# Altium PCB PCB1.PcbDoc (part 1 of 2)
Units mil, origin at the board's own origin, x right, y up, seen from the top; angles counter-clockwise.
Board outline 3937.01 x 3937.01 mil, 2 copper layers (Top Layer, Bottom Layer); 170 components, 123 nets, 575 pads, 355 vias.
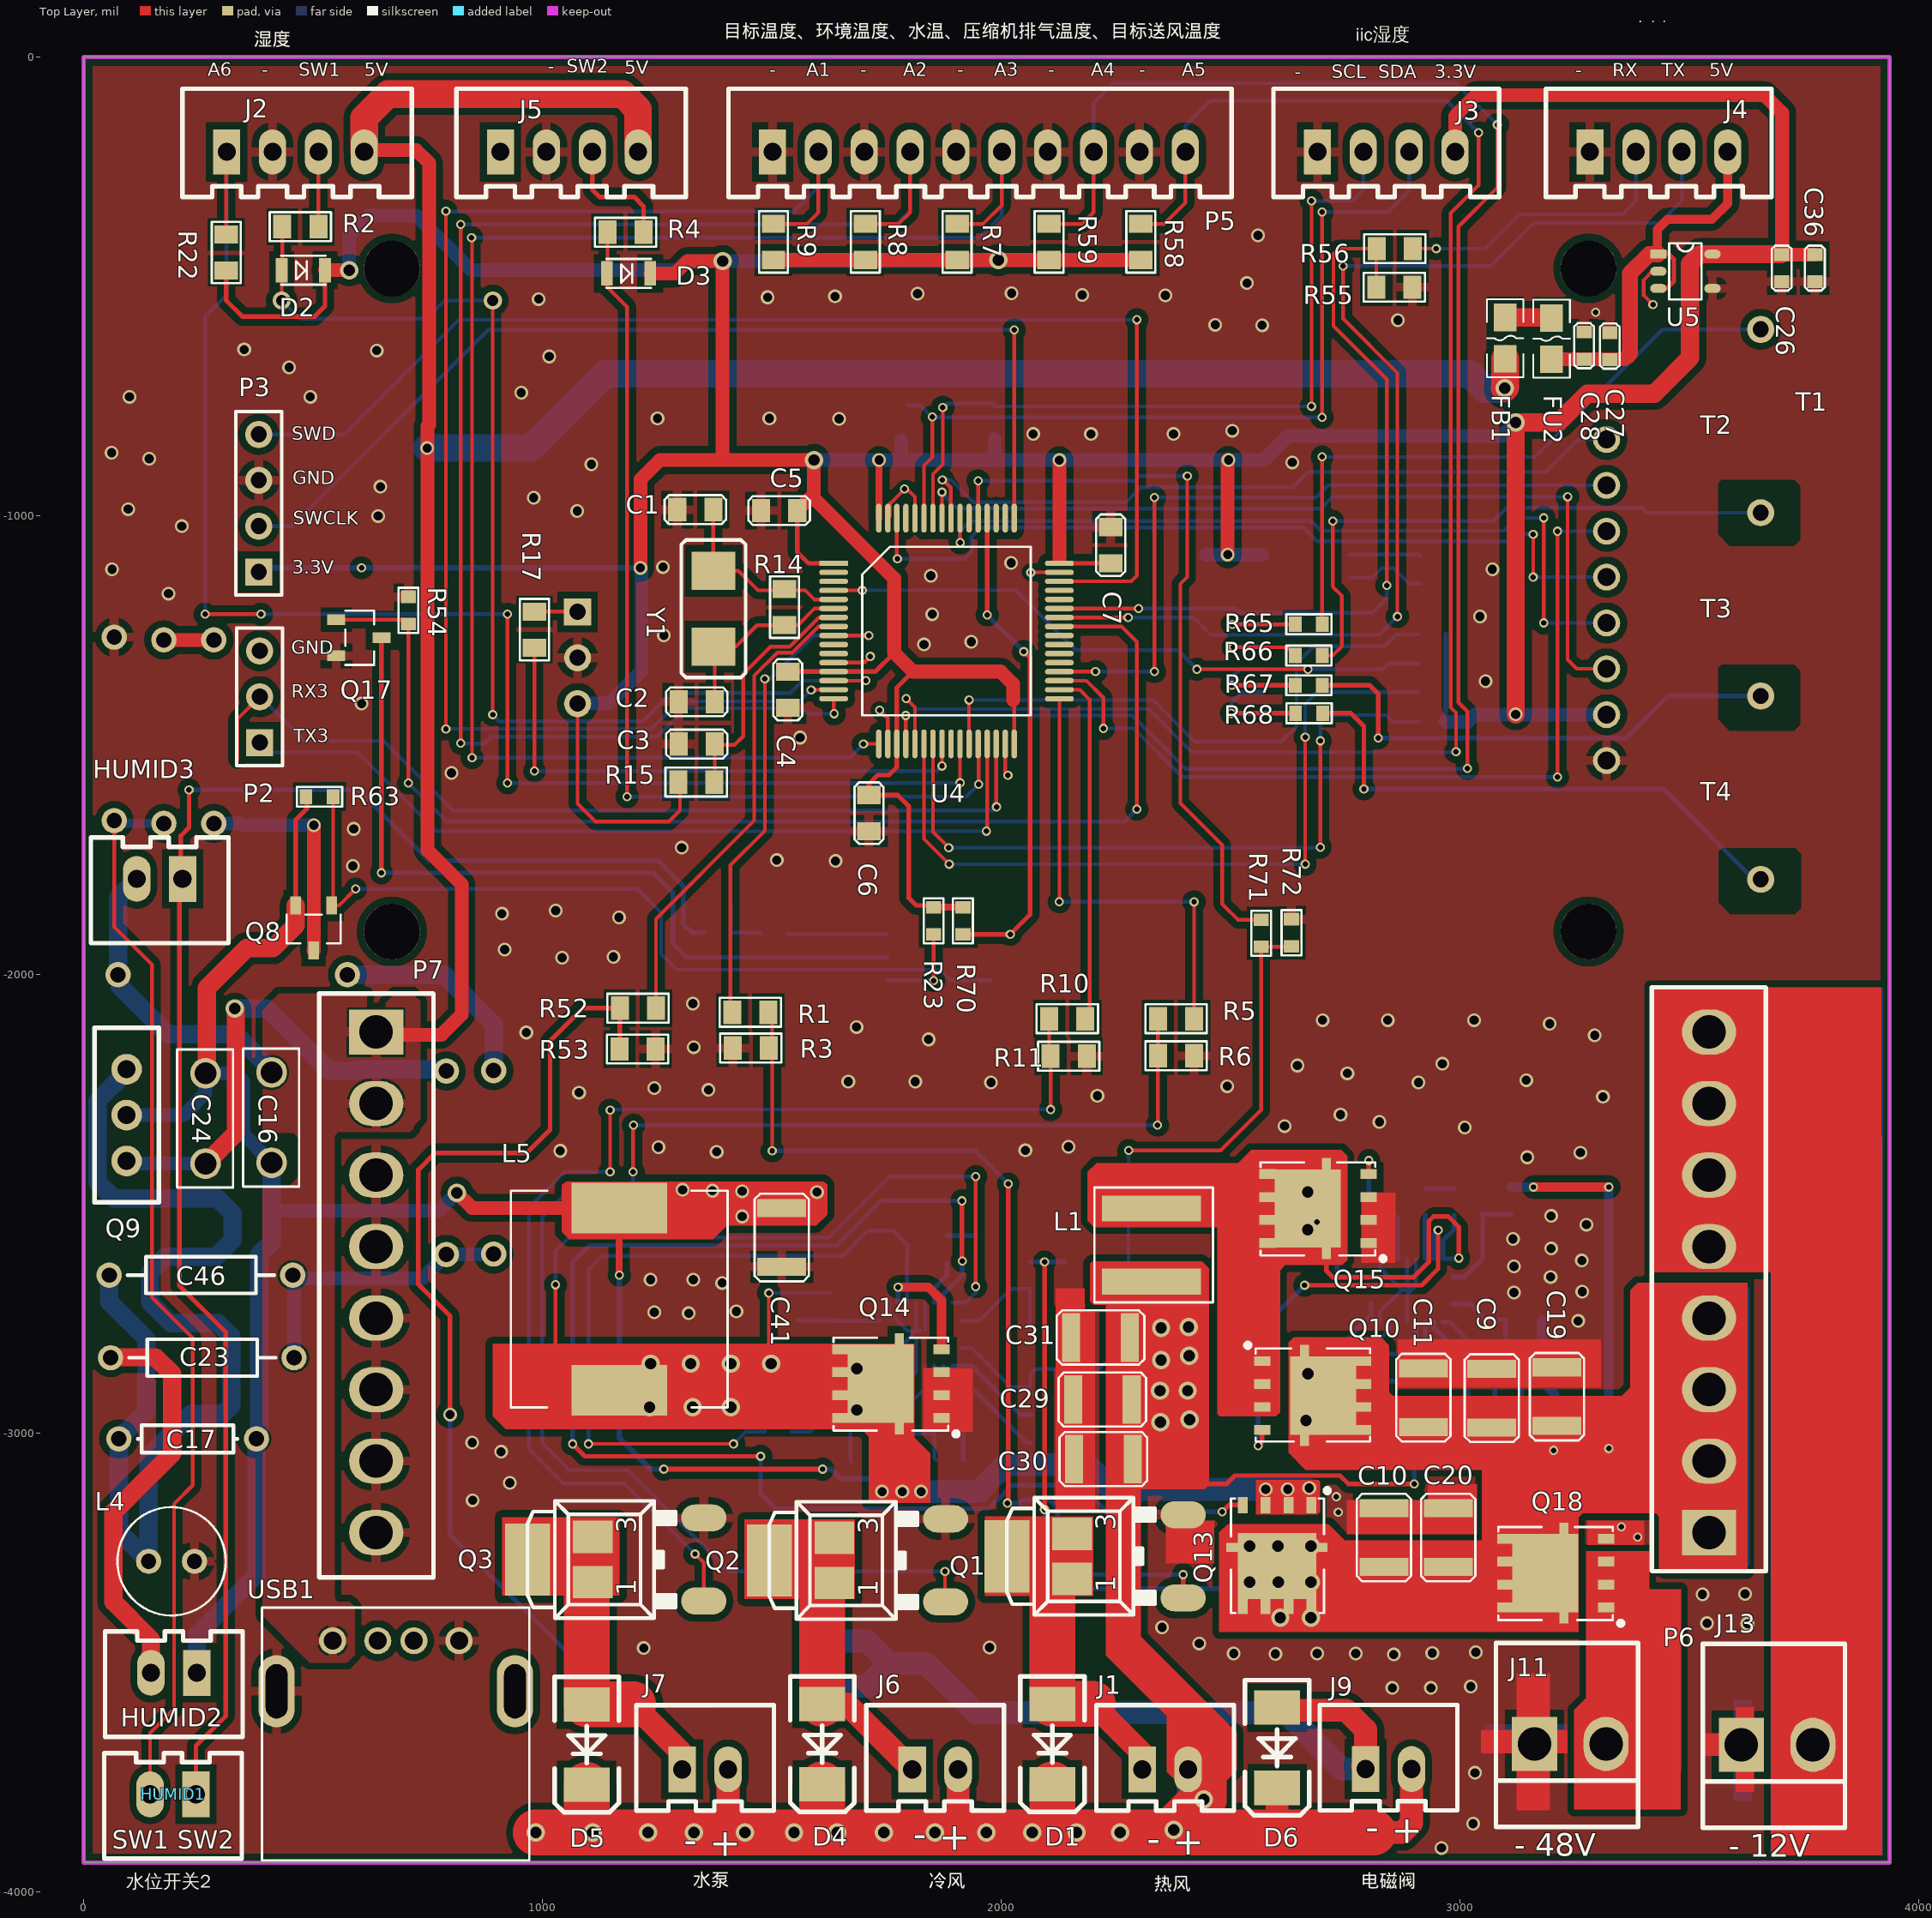
[diagram p0: Top Layer view]
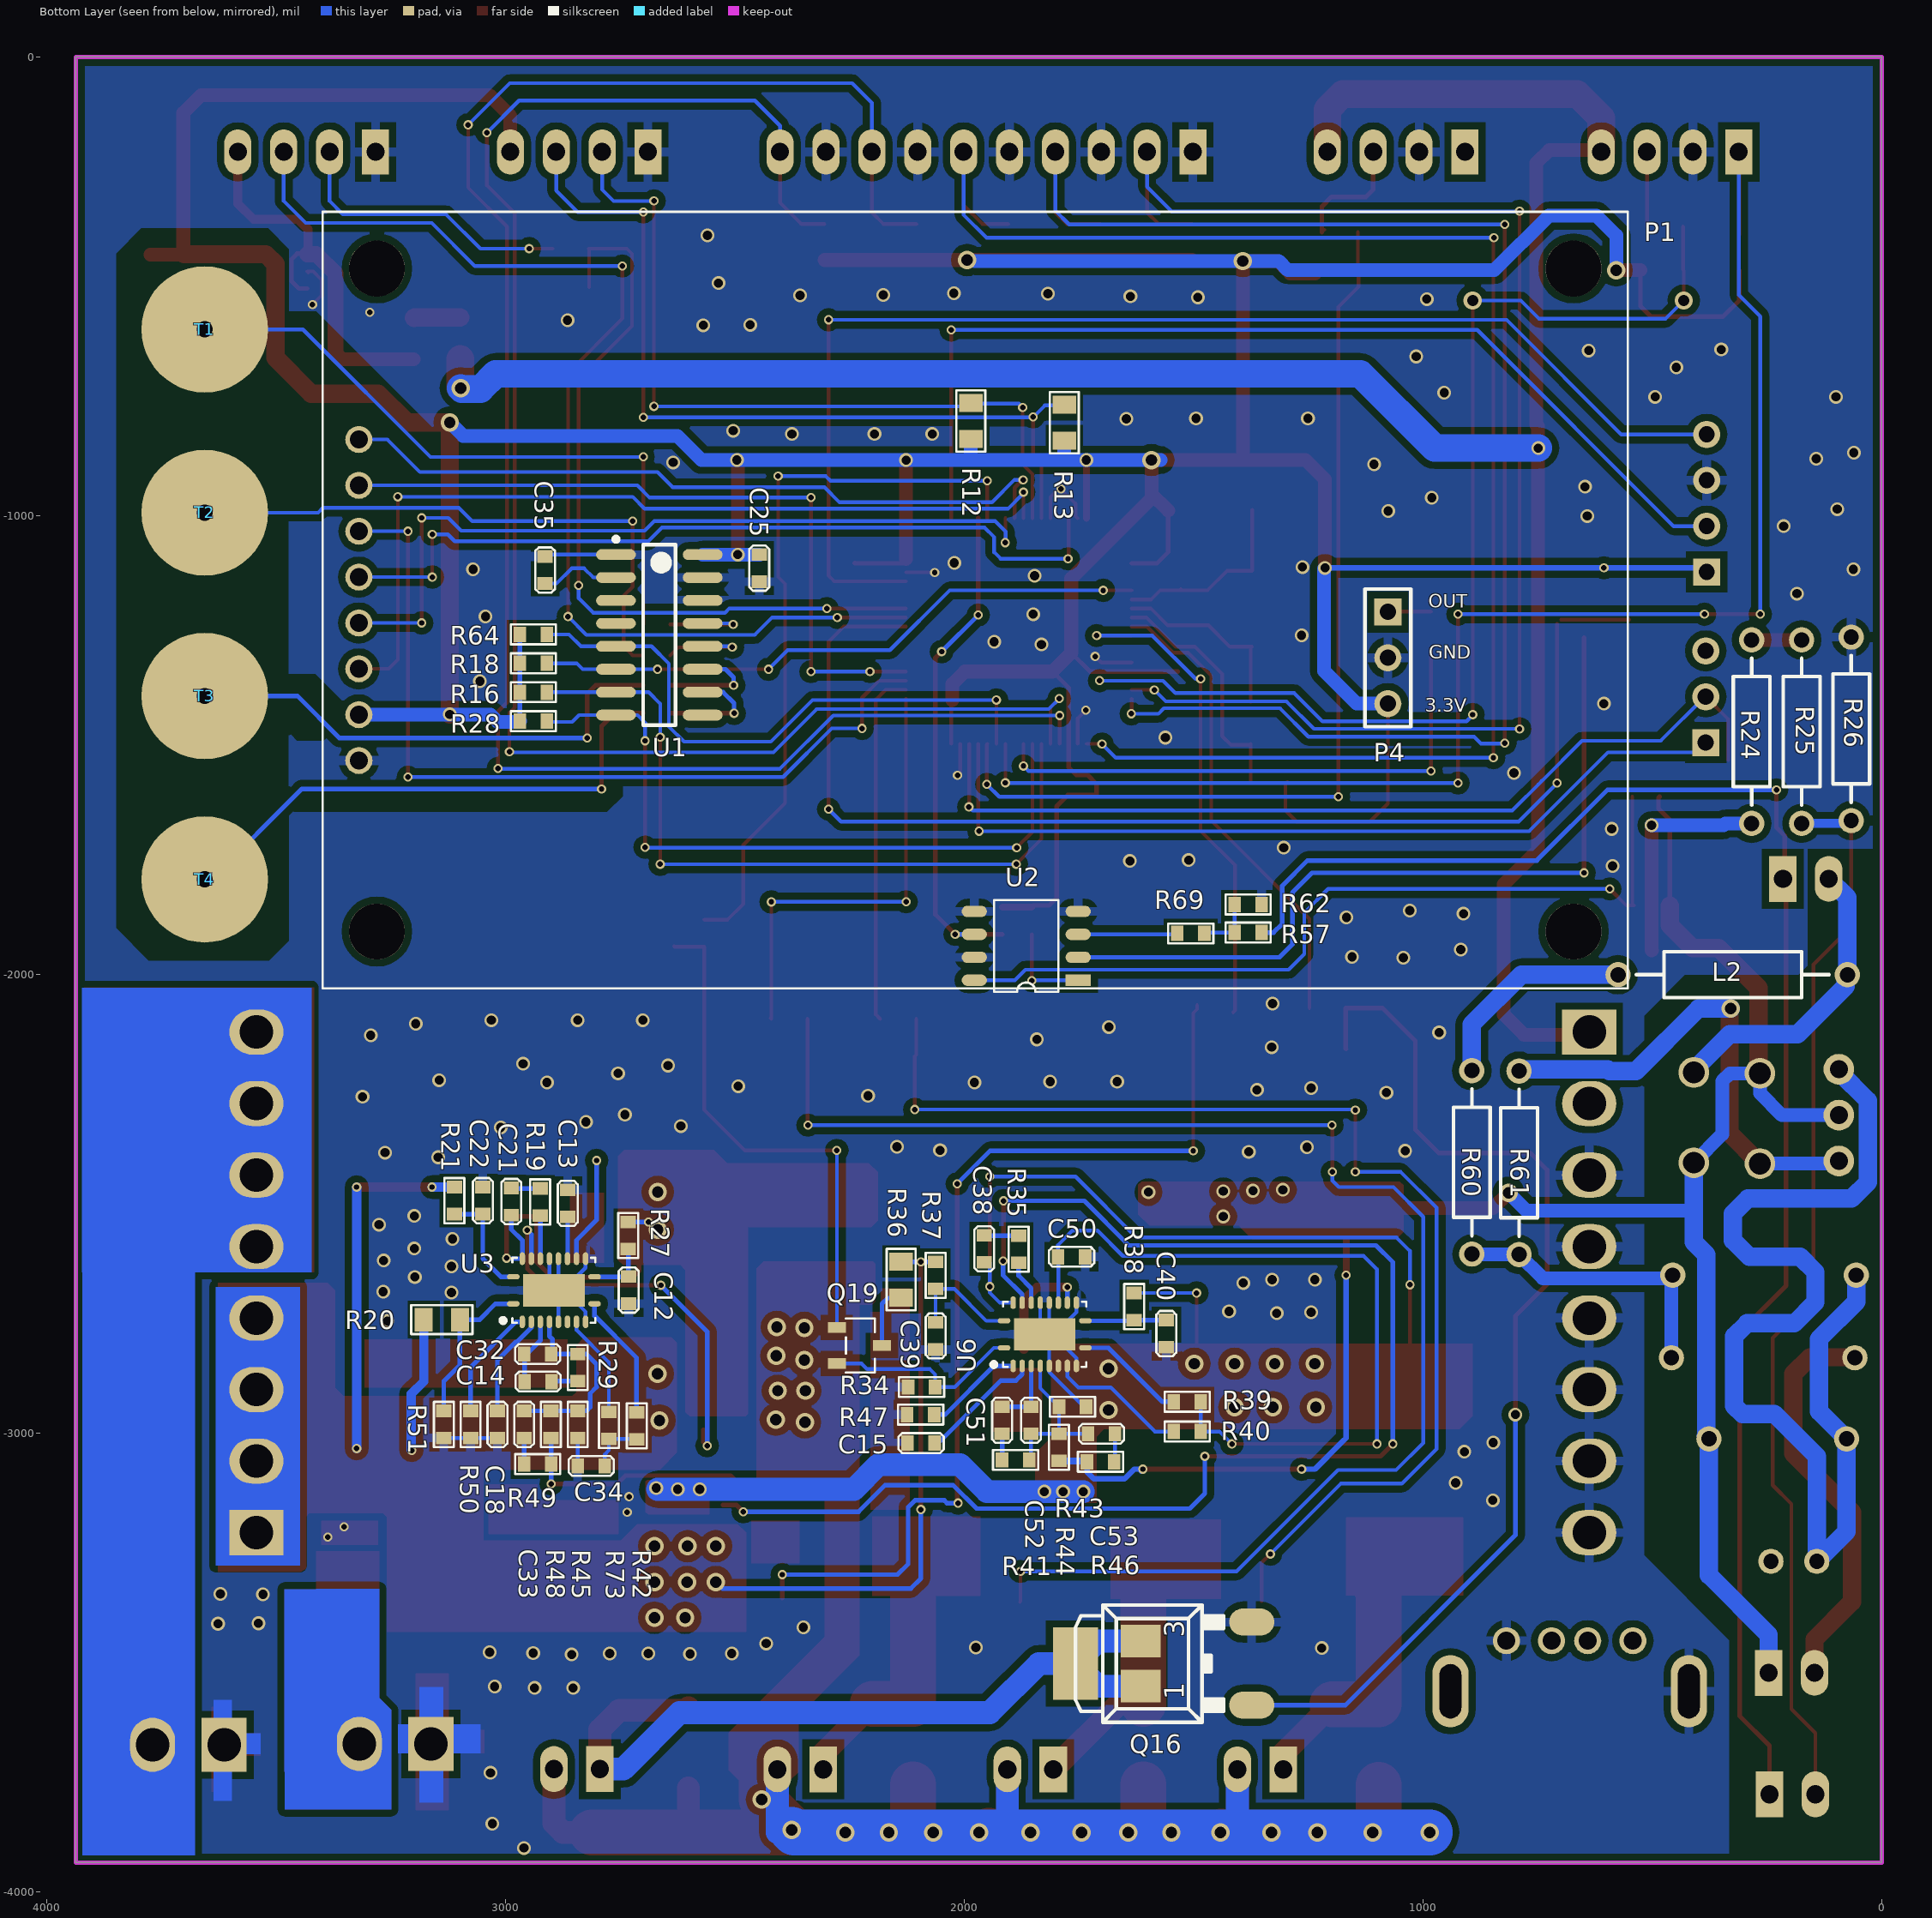
[diagram p1: Bottom Layer view, seen from below]

## Layer stack, top to bottom
Top Layer: signal copper 1.4
Dielectric: dielectric 12.6, FR-4, Dk 4.8
Bottom Layer: signal copper 1.4

## Board outline
0,-3937.01 3937.01,-3937.01 3937.01,0 0,0

## Design rules (kind name [scope] priority, off if disabled: settings)
Clearance Clearance_1 [InPoly And InNet(GND)] p1: gap=15
Clearance [All] p2: gap=5
MinimumSolderMaskSliver [All] p1: minsoldermaskwidth=1
PolygonConnect PolygonConnect_1 [IsVia] p1: connectstyle=Direct reliefconductorwidth=10 reliefentries=4 polygonreliefangle="90 Angle"
PolygonConnect [All] p2: connectstyle=Relief reliefconductorwidth=20 reliefentries=4 polygonreliefangle="90 Angle"
RoutingVias [All] p1: holewidth=28 width=50 viastyle="Through Hole" minholewidth=28 minwidth=50 maxholewidth=28 maxwidth=50
SilkToSilkClearance [All] p1: silktosilkclearance=1
SilkscreenOverComponentPads [All] p1: minsilkscreentomaskgap=1
SolderMaskExpansion [All] p1: expansion=4
Width [All] p1: maxlimit=200 minlimit=6 preferedwidth=10
25 further rules are at their usual default settings.

## Classes and differential pairs
component class Humidifier: C10 C15 C16 C17 C20 C23 C24 C38 C39 C40 C41 C46 C50 C51 C52 C53 HUMID1 HUMID2 HUMID3 J11 L2 L4 L5 Q8 Q9 Q13 Q14 Q17 Q18 Q19 R23 R24 R25 R26 R34 R35 R36 R37 R38 R39 R40 R41 R43 R44 R46 R47 R54 R57 R60 R61 R62 R63 R69 R70 R71 R72 U2 U6
component class cpu: C1 C2 C3 C4 C5 C6 C7 C25 C35 P1 P2 P3 P4 R12 R13 R14 R15 R16 R17 R18 R28 R55 R56 R64 R65 R66 R67 R68 T1 T2 T3 T4 U1 U4 Y1
component class Connector: D1 D2 D3 D4 D5 D6 J1 J2 J3 J4 J5 J6 J7 J9 P5 Q1 Q2 Q3 Q16 R1 R2 R3 R4 R5 R6 R7 R8 R9 R10 R11 R22 R52 R53 R58 R59
component class POWER: C9 C11 C12 C13 C14 C18 C19 C21 C22 C25 C26 C27 C28 C29 C30 C31 C32 C33 C34 FB1 FU2 J13 L1 P6 P7 Q10 Q15 R19 R20 R21 R27 R28 R29 R42 R45 R48 R49 R50 R51 U3 U5 USB1

## Components (designator, comment, footprint, x,y, rotation, side; value= is the part's Value field where it differs from the comment)
C1 "22pF" 0805c 1294,-987 r0 top
C2 "22pF" 0805c 1297,-1406 r0 top
C3 "100nF" 0805c 1297,-1498 r0 top
C4 "100nF" 0805c 1535,-1419 r90 top
C5 "100nF" 0805c 1477,-989 r0 top
C6 "100nF" 0805c 1712,-1688 r90 top
C7 "100nF" 0805c 2239,-1025 r270 top
C9 "GRM32ER72A225KA35L" 1210C 3069.77,-2988 r90 top
C10 "GRM32ER72A225KA35L" 1210C 2834.77,-3292 r90 top
C11 "GRM32ER72A225KA35L" 1210C 2920.77,-2987 r90 top
C12 "6.8pF/100V" 0603C 2731.77,-2718 r90 bottom
C13 "EMK107BB7225MA-T" 0603C 2864.77,-2529 r90 bottom
C14 "18nF/16V" 0603C 2958.77,-2888 r180 bottom
C15 "18nF/16V" 0603C 2064.77,-3022 r0 bottom
C16 "10nF/630V" CAP_5MM 409.77,-2214 r270 top
C17 "1.5nF/630V" AXIAL-0.3 226.77,-3013 r0 top
C18 "18nF/16V" 0603C 3018.02,-2951.94 r270 bottom
C19 "GRM32ER72A225KA35L" 1210C 3211.77,-2985 r90 top
C20 "GRM32ER72A225KA35L" 1210C 2974.77,-3292 r90 top
C21 "0.1uF/25V" 0603C 2987.77,-2466 r270 bottom
C22 "C1608X7S2A104K080AB" 0603C 3049.77,-2464 r270 bottom
C23 "47nF/630V" AXIAL-0.4 258.77,-2836 r180 top
C24 "100p/1000v" CAP_5MM 265.77,-2216 r270 top
C25 "0.1uF" 0603C 2447,-1085 r270 bottom
C26 "10uF/10V" 0603C 3701.77,-490 r90 top
C27 "10uF/10V" 0603C 3327,-601 r270 top
C28 "0.1uF/10V" 0603C 3271,-659 r90 top
C29 "GRM32ER71A476KE15L" 1210C 2284.77,-2927 r180 top
C30 "GRM32ER71A476KE15L" 1210C 2286.77,-3057 r180 top
C31 "GRM32ER71A476KE15L" 1210C 2280.77,-2792 r180 top
C32 "1pF/16V" 0603C 2959.77,-2828 r180 bottom
C33 "470pF/16V" 0603C 2959.65,-2951.94 r270 bottom
C34 "2.2uF/16V" 0603C 2784,-3072 r0 bottom
C35 "4.7nF/10V" 0603C 2914,-1089 r270 bottom
C36 "0.1uF/10V" 0603C 3774,-430.94 r270 top
C38 "0.1uF/25V" 0603C 1956.77,-2569 r270 bottom
C39 "C1608X7S2A104K080AB" 0603C 2062.77,-2818 r90 bottom
C40 "3pF/100V" 0603C 1559.77,-2813 r90 bottom
C41 "GRM32ER71A476KE15L" 1210C 1521.77,-2510 r270 top
C46 "47nF/630V" AXIAL-0.4 255.77,-2656 r180 top
C50 "EMK107BB7225MA-T" 0603C 1795.77,-2616 r180 bottom
C51 "22nF/16V" 0603C 1917.77,-2943 r270 bottom
C52 "1pF/16V" 0603C 1854.77,-2942.94 r270 bottom
C53 "1.5nF/16V" 0603C 1730.77,-3001.94 r180 bottom
D1 "1N4004" D7227 2111.74,-3591 r270 top
D2 "1N4148" sod323 431.77,-465 r0 top
D3 "1N4148" sod323 1140.77,-472 r0 top
D4 "1N4004" D7227 1610.26,-3591 r270 top
D5 "1N4004" D7227 1096.77,-3592 r270 top
D6 "1N4004" D7227 2601.77,-3599 r270 top
FB1 "100R1A" F0805 3099,-658 r90 top
FU2 "500mA/6V" F0805 3200,-569 r270 top
HUMID1 "Header 2" SIP-2L 194.77,-3788 r180 top
HUMID2 "Header 2" SIP-2L 196.77,-3523 r180 top
HUMID3 "" SIP-2L 165.77,-1792 r180 top
J1 "OUT-A" SIP-2L 2357.77,-3733.5 r0 top
J2 "IIC" SIP-4L 311.77,-207 r0 top
J3 "IIC" SIP-4L 2689.77,-207 r0 top
J4 "USRT" SIP-4L 3283.77,-207 r0 top
J5 "IIC" SIP-4L 908.77,-207 r0 top
J6 "OUT-B" SIP-2L 1856.27,-3733.5 r0 top
J7 "OUT-C" SIP-2L 1354.77,-3733.5 r0 top
J9 "OUT-C" SIP-2L 2844.77,-3733 r0 top
J11 "SIP2-2.54" CH3.96-2P 3318.77,-3678 r0 top
J13 "OUT-B" CH3.96-2P 3769.77,-3680 r0 top
L1 "XAL6060-682MEB" XAL6060 2327.77,-2511 r270 top
L2 "100uH" AXIAL-0.5 325,-2001 r180 bottom
L4 "47uH" 6*8 191.77,-3280 r180 top
L5 "SRR1210-560M" SRR1210 1167.77,-2907 r90 top
P1 "Header 8" TFT2.4 3320,-834 r180 bottom locked
P2 "Header 3" HDR1X3 383.77,-1495 r90 top
P3 "Header 4" HDR1X4 381.77,-1123 r90 top
P4 "Header 3" HDR1X3 1076.77,-1210 r270 bottom
P5 "Header 10" SIP-10L 1501.77,-207 r0 top
P6 "Header 8" CH3.96-8P 3543.31,-3217.33 r90 top locked
P7 "Header 8" CH3.96-8P 637.8,-2125.98 r270 top locked
Q1 "NCE4060K" TO-252-3S 2150.77,-3269 r90 top
Q2 "NCE4060K" TO-252-3S 1632.77,-3278 r90 top
Q3 "NCE4060K" TO-252-3S 1105.77,-3276 r90 top
Q8 "SI2343" SOT23-3 540.77,-1850 r90 top
Q9 "BU406" to220 93.77,-2407 r90 top
Q10 "BSC117N08NS5ATMA1" "PowerPAK SO-8" 2531.77,-2817 r0 top
Q13 "BSC117N08NS5ATMA1" "PowerPAK SO-8" 2702.94,-3119.72 r270 top
Q14 "BSC037N08NS5ATMA1" "PowerPAK SO-8" 1907.77,-2994 r180 top
Q15 "BSC037N08NS5ATMA1" "PowerPAK SO-8" 2838.77,-2612 r180 top
Q16 "NCE4060K" TO-252-3S 1619.77,-3503 r90 bottom
Q17 "S8050" SOT23-3 550.77,-1227 r180 top
Q18 "SI7489DP" "PowerPAK SO-8" 3356.77,-3407 r180 top
Q19 "S8050" SOT23-3 2278,-2770 r0 bottom
R1 "22R" 0805R 1414,-2083 r0 top
R2 "10K" 0805R 511.77,-370 r180 top
R3 "470K" 0805R 1415,-2161 r0 top
R4 "10K" 0805R 1220.77,-382 r180 top
R5 "22R" 0805R 2420.77,-2097 r180 top
R6 "470k" 0805R 2420.77,-2177.74 r180 top
R7 "10K" 0805R 1904.27,-364 r270 top
R8 "10K" 0805R 1704.02,-364 r270 top
R9 "10K" 0805R 1503.77,-364 r270 top
R10 "22R" 0805R 2183.77,-2097 r180 top
R11 "470k" 0805R 2186.77,-2178.74 r180 top
R12 "2K" 0805R 1986,-833 r90 bottom
R13 "2K" 0805R 1782,-837 r90 bottom
R14 "1MR" 0805R 1528,-1239 r90 top
R15 "10K" 0805R 1296,-1581 r0 top
R16 "3K" 0603R 2969,-1385 r180 bottom
R17 "100" 0805R 982.77,-1288 r90 top
R18 "3K" 0603R 2969,-1322 r180 bottom
R19 "0" 0603R 2924.77,-2467 r270 bottom
R20 "121K" 0805R 3099.77,-2753 r0 bottom
R21 "2.2" 0603R 3111.77,-2464 r270 bottom
R22 "10K" 0805R 310.77,-387 r270 top
R23 "100" 0603r 1853,-1913 r90 top
R24 "1.2K" AXIAL-0.4 283.77,-1471 r270 bottom
R25 "1.2K" AXIAL-0.4 174.77,-1471 r270 bottom
R26 "4.7K" AXIAL-0.4 66.77,-1465 r270 bottom
R27 "1.65K" 0603R 2732.77,-2540 r270 bottom
R28 "3K" 0603R 2969,-1448 r180 bottom
R29 "2.37K" 0603R 2842.77,-2828 r270 bottom
R34 "8.06K" 0603R 2122.77,-2900 r180 bottom
R35 "0" 0603R 1881.77,-2570 r270 bottom
R36 "121K" 0805R 2137.77,-2705 r90 bottom
R37 "2.2" 0603R 2062.77,-2627 r270 bottom
R38 "2.1K" 0603R 1629.77,-2695 r270 bottom
R39 "20K" 0603R 1543.77,-2932 r180 bottom
R40 "20K" 0603R 1543.77,-2997 r180 bottom
R41 "4.99K" 0603R 1858.77,-3058.94 r0 bottom
R42 "20K" 0603R 2714,-2955 r270 bottom
R43 "665" 0603R 1793.77,-2942.94 r180 bottom
R44 "18K" 0603R 1793.77,-3060.94 r90 bottom
R45 "1.27K" 0603R 2842.9,-2951.94 r270 bottom
R46 "4.64" 0603R 1732.77,-3062.94 r180 bottom
R47 "39.2K" 0603R 2124.77,-2960 r180 bottom
R48 "18K" 0603R 2901.27,-3011 r90 bottom
R49 "19.1" 0603R 2900.77,-3068 r0 bottom
R50 "28.7K" 0603R 3076.4,-3011 r90 bottom
R51 "8.06K" 0603R 3134.77,-3011 r90 bottom
R52 "22R" 0805R 1247.77,-2074 r180 top
R53 "470k" 0805R 1246.77,-2163 r180 top
R54 "4.7K" 0603r 708,-1177 r270 top
R55 "20K" 0805R 2896.77,-502 r180 top
R56 "10K" 0805R 2897.77,-418 r180 top
R57 "100k" 0603r 1411,-1909 r180 bottom
R58 "10K" 0805R 2304.77,-364 r270 top
R59 "10K" 0805R 2104.52,-442.74 r90 top
R60 "10" AXIAL-0.4 893.77,-2410 r90 bottom
R61 "2.2" AXIAL-0.4 790.77,-2411 r90 bottom
R62 "20K" 0603r 1352,-1848 r0 bottom
R63 "1K" 0603R 543.77,-1613 r180 top
R64 "3K" 0603R 2969,-1259 r180 bottom
R65 "3K" 0603R 2700.43,-1237 r180 top
R66 "3K" 0603R 2700.43,-1305 r180 top
R67 "3K" 0603R 2700.43,-1370 r180 top
R68 "3K" 0603R 2701,-1431 r180 top
R69 "1K" 0603R 1536,-1911 r180 bottom
R70 "100" 0603R 1917,-1913 r90 top
R71 "1K" 0603R 2567,-1881 r270 top
R72 "20K" 0603R 2633,-1939 r90 top
R73 "20K" 0603R 2775,-2954 r270 bottom
T1 "TP" TOUCH-PAD 3656,-594 r0 top
T2 "TP" TOUCH-PAD 3656,-993.67 r0 top
T3 "TP" TOUCH-PAD 3656,-1393.33 r0 top
T4 "TP" TOUCH-PAD 3656,-1793 r0 top
U1 "TC334" SOIC127P600X265-16N 2665,-1260 r180 bottom
U2 "TLP521-2" SO-8 1752,-2013 r0 bottom
U3 "LM5145" QFN050P600-8N 2894.77,-2689 r90 bottom
U4 "STM32F103R8T6" LQFP-64 1635,-1104 r0 top
U5 "TLV70233DBVR" SOT23-5(DBV) 3432.77,-430 r0 top
U6 "LM5145" QFN050P600-8N 1824.77,-2785 r90 bottom
USB1 "Header 5" USB-A 542.77,-3453 r0 top
Y1 "8MHz" SMT5032 1373,-1203 r90 top

## Footprints (in the part's own frame and the unit in brackets; to place one, negate y for a bottom-side part, rotate by r counter-clockwise, add the part's x,y. Pads: shape width x height; smd on the part's side, far side on the other; paste and mask are expansions set on the pad)
6*8 [mil]
  round 55 hole 33: 1(50,0) 2(-50,0)
  silkscreen extent -118,-118 118,118
0603C [mm]
  rect 0.7x0.85 smd: 1(0,0) 2(1.5,0)
  silkscreen extent -0.5,-0.55 2,0.55
0603R [mm]
  rect 0.7x0.85 smd: 1(0,0) 2(1.5,0)
  silkscreen extent -0.5,-0.55 2,0.55
0603r [mm]
  rect 0.7x0.85 smd: 1(0,0) 2(1.5,0)
  silkscreen extent -0.5,-0.55 2,0.55
0805c [mm]
  rect 1x1.3 smd: 1(0,0) 2(2,0)
  silkscreen extent -0.7,-0.8 2.7,0.8
0805R [mm]
  rect 1x1.3 smd: 1(0,0) 2(2,0)
  silkscreen extent -0.7,-0.8 2.7,0.8
1210C [mm]
  rect 1x2.7 smd: 1(0,0) 2(3.25,0)
  silkscreen extent -0.8,-1.5 4.05,1.5
AXIAL-0.3 [mm] "Axial Device, Thru-Hole; 2 Leads; 0.3 in Pin Spacing"
  round 1.4 hole 0.85: 1(-3.81,0) 2(3.81,0)
  silkscreen extent -2.77,-0.76 2.77,0.76
AXIAL-0.4 [mm] "Axial Device, Thru-Hole; 2 Leads; 0.4 in Pin Spacing"
  round 1.4 hole 0.85: 1(-5.08,0) 2(5.08,0)
  silkscreen extent -4.06,-1.02 4.06,1.02
AXIAL-0.5 [mm] "Axial Device, Thru-Hole; 2 Leads; 0.5 in Pin Spacing"
  round 1.4 hole 0.85: 1(-6.35,0) 2(6.35,0)
  silkscreen extent -5.33,-1.27 5.33,1.27
CAP_5MM [mm]
  round 1.7 hole 1.2: 1(0,0) 2(5,0)
  silkscreen extent -1.32,-1.57 6.32,1.52
CH3.96-2P [mm]
  rect 2.5x3 hole 1.85: 1(-3.96,0)
  oval 2.5x3 hole 1.85: 2(0,0)
  silkscreen extent -6.1,-4.6 1.78,5.59, body extent -5.94,-3.91 1.92,4.59, height 10.9
CH3.96-8P [mm]
  rect 2.5x3 hole 1.85: 1(0,0)
  oval 2.5x3 hole 1.85: 2(3.96,0) 3(7.92,0) 4(11.88,0) 5(15.84,0) 6(19.8,0) 7(23.76,0) 8(27.72,0)
  silkscreen extent -2.14,-3.15 30.2,3.18
D7227 [mil]
  rect 75x100 smd: A(0,0) K(175,0)
  silkscreen extent -60,-70 235,70, body extent -22,-57 194,53, height 88
F0805 [mil]
  rect 60x50 smd: 1(0,0) 2(90,0)
  silkscreen extent -40,-40 130,40, body extent 4,-23 82,24, height 20
HDR1X3 [mm] "Connector; Header; 3 Position"
  rect 1.5x1.5 hole 0.9: 1(0,0)
  round 1.5 hole 0.9: 2(2.54,0) 3(5.08,0)
  silkscreen extent -1.27,-1.27 6.35,1.27
HDR1X4 [mm] "Connector; Header; 4 Position"
  rect 1.5x1.5 hole 0.9: 1(0,0)
  round 1.5 hole 0.9: 2(2.54,0) 3(5.08,0) 4(7.62,0)
  silkscreen extent -1.27,-1.27 8.89,1.27
LQFP-64 [mm]
  rect 1.6x0.3 smd: 1(0,0)
  oval 1.6x0.3 smd: 2(0,-0.5) 3(0,-1) 4(0,-1.5) 5(0,-2) 6(0,-2.5) 7(0,-3) 8(0,-3.5) 9(0,-4) 10(0,-4.5) 11(0,-5) 12(0,-5.5) 13(0,-6) 14(0,-6.5) 15(0,-7) 16(0,-7.5) 33(12.5,-7.5) 34(12.5,-7) 35(12.5,-6.5) 36(12.5,-6) 37(12.5,-5.5) 38(12.5,-5) 39(12.5,-4.5) 40(12.5,-4) 41(12.5,-3.5) 42(12.5,-3) 43(12.5,-2.5) 44(12.5,-2) 45(12.5,-1.5) 46(12.5,-1) 47(12.5,-0.5) 48(12.5,0)
  oval 0.3x1.6 smd: 17(2.5,-10) 18(3,-10) 19(3.5,-10) 20(4,-10) 21(4.5,-10) 22(5,-10) 23(5.5,-10) 24(6,-10) 25(6.5,-10) 26(7,-10) 27(7.5,-10) 28(8,-10) 29(8.5,-10) 30(9,-10) 31(9.5,-10) 32(10,-10) 49(10,2.5) 50(9.5,2.5) 51(9,2.5) 52(8.5,2.5) 53(8,2.5) 54(7.5,2.5) 55(7,2.5) 56(6.5,2.5) 57(6,2.5) 58(5.5,2.5) 59(5,2.5) 60(4.5,2.5) 61(4,2.5) 62(3.5,2.5) 63(3,2.5) 64(2.5,2.5)
  silkscreen extent 1.59,-8.41 10.91,0.91
"PowerPAK SO-8" [mm]
  rect 0.9x0.54 smd: 1(0.95,-0.67) 2(0.95,-1.94) 3(0.95,-3.21) 4(0.95,-4.48) 5(6.548,-4.48) 6(6.548,-3.21) 7(6.548,-1.94) 8(6.548,-0.67)
  rect 0.5x1.6 smd: 5(3.3,-4.575) 8(3.3,-0.575)
  rect 3.66x2.5 smd: 5(4.325,-3.495)
  rect 3.66x2 smd: 8(4.325,-1.401)
  silkscreen extent 0.03,-5.12 6.93,0.33
QFN050P600-8N [mm]
  oval 0.3x0.7 smd: 1(-0.75,2.25) 10(-0.75,-2.25) 11(0.75,-2.25) 20(0.75,2.25)
  oval 0.7x0.3 smd: 2(-1.75,1.75) 3(-1.75,1.25) 4(-1.75,0.75) 5(-1.75,0.25) 6(-1.75,-0.25) 7(-1.75,-0.75) 8(-1.75,-1.25) 9(-1.75,-1.75) 12(1.75,-1.75) 13(1.75,-1.25) 14(1.75,-0.75) 15(1.75,-0.25) 16(1.75,0.25) 17(1.75,0.75) 18(1.75,1.25) 19(1.75,1.75)
  rect 1.8x3.4 smd: 21(0,0)
  silkscreen extent -1.8,-2.3 1.8,2.94, body extent -1.8,-2.3 1.8,2.3, height 0.8
SIP-2L [mil]
  rect 60x100 hole 40: 1(-50,0)
  oval 60x100 hole 40: 2(50,0)
  silkscreen extent -150,-90 150,140
SIP-4L [mm]
  rect 1.5x2.5 hole 1: 1(0,0)
  oval 1.5x2.5 hole 1: 2(2.54,0) 3(5.08,0) 4(7.62,0)
  silkscreen extent -2.44,-2.5 10.26,3.5
SIP-10L [mm]
  rect 1.5x2.5 hole 1: 1(0,0)
  oval 1.5x2.5 hole 1: 2(2.54,0) 3(5.08,0) 4(7.62,0) 5(10.16,0) 6(12.7,0) 7(15.24,0) 8(17.78,0) 9(20.32,0) 10(22.86,0)
  silkscreen extent -2.44,-2.5 25.43,3.5
SMT5032 [mm]
  rect 2.1x2.4 smd: 1(-2.1,0) 2(2.1,0)
  silkscreen extent -3.81,-1.78 3.81,1.78
SO-8 [mil]
  rect 55x25 smd: 1(0,0)
  oval 55x25 smd: 2(0,-50) 3(0,-100) 4(0,-150) 5(226.38,-150) 6(226.38,-100) 7(226.38,-50) 8(226.38,0)
  silkscreen extent 43,-175 183,25
sod323 [mm]
  rect 0.65x1.35 smd: A(0,0) K(2.4,0)
  silkscreen extent -0.03,-0.8 2.44,0.8
SOIC127P600X265-16N [mm] "SOIC, 16-Leads, Body 10.0x4.0mm (max), Pitch 1.27mm, IPC Medium Density"
  oval 2.2x0.6 smd: 1(-2.4,4.445) 2(-2.4,3.175) 3(-2.4,1.905) 4(-2.4,0.635) 5(-2.4,-0.635) 6(-2.4,-1.905) 7(-2.4,-3.175) 8(-2.4,-4.445) 9(2.4,-4.445) 10(2.4,-3.175) 11(2.4,-1.905) 12(2.4,-0.635) 13(2.4,0.635) 14(2.4,1.905) 15(2.4,3.175) 16(2.4,4.445)
  silkscreen extent -2.53,-5 0.9,5.42, body extent -2,-5 2,5, height 2.65
SOT23-3 [mm]
  rect 1x0.6 smd: 1(0,0) 2(0,2) 3(-2.5,1)
  silkscreen extent -2.1,-0.5 -0.5,2.5
SOT23-5(DBV) [mm]
  rect 0.9x0.5 smd: 1(0,0)
  oval 0.9x0.5 smd: 2(0,-0.95) 3(0,-1.9) 4(3,-1.9) 5(3,0)
  silkscreen extent 0.6,-2.5 2.4,0.6
SRR1210 [mm]
  rect 2.8x5.3 smd: 1(0,0) 2(10.1,0)
  silkscreen extent -0.95,-6 11.05,6
TFT2.4 [mm]
  round 1.5 hole 1: 1(0,-17.78) 2(0,-15.24) 3(0,-12.7) 4(0,-10.16) 5(0,-7.62) 6(0,-5.08) 7(0,-2.54) 8(0,0)
  round 3.1 hole 3.1: 9(1,-27.25) 9(1,9.47) 9(67.26,-27.25) 9(67.26,9.47)
  silkscreen extent -2,-30.39 70.26,12.61
to220 [mm]
  round 1.7 hole 1: 1(0,0) 2(2.54,0) 3(5.08,0)
  silkscreen extent -2.29,-1.78 7.37,1.78
TO-252-3S [mm]
  oval 1.5x2.5 smd: 1(-2.3,-6.25) 3(2.3,-6.25)
  rect 1.8x2.2 smd: 2(-1.25,-0.1) 2(1.25,-0.1)
  rect 4x2.5 smd: 2(0,3.5)
  silkscreen extent -3.25,-4.7 3.25,3.5
TOUCH-PAD [mm]
  round 1.5 hole 0.9: 1(0,0)
  round 7 smd far side: ""(0,0)
USB-A [mm]
  round 1.5 hole 1: 1(0,0) 2(2.5,0) 3(4.5,0) 4(7,0)
  oval 2x4 hole 1.2 slot 3 at 90 deg: 5(-3.1,-2.8) 6(10.1,-2.8)
  silkscreen extent -3.91,-12.17 10.89,1.83
XAL6060 [mm]
  rect 1.43x5.5 smd: 1(0,0) 2(4.04,0)
  silkscreen extent -1.17,-3.15 5.19,3.41

## Part data
C1 C2 C3 C4 C5 C6 C7: library part CAP, "Capacitor"
C9 C10 C11 C12 C13 C14 C15 C18 C19 C20 C21 C22 C29 C30 C31 C32 C33 C34 C38 C39 C40 C41 C50 C51 C52 C53: library part 0.01UF, "CCX85-103"
C16 C17 C23 C24 C25 C26 C27 C28 C35 C36 C46: library part Cap, "Capacitor"
D1 D4 D5 D6: library part Diode_2, "Default Diode"
D2 D3: library part Diode, "Default Diode"
FB1 FU2: library part FUSE2, "Fuse"
HUMID1 HUMID2: "Header, 2-Pin"
HUMID3: library part "Header 2", "Header, 2-Pin"
J1 J6 J7 J9 J13: library part CON2, "Connector"
J2 J3 J4 J5: library part SIP4-2.54, "CN-SIP4-2.54"
J11: "CN-SIP2-2.54"
L1 L5: library part INDUCTOR
L2 L4: library part Inductor, "Inductor"
P1 P6 P7: "Header, 8-Pin"
P2 P4: "Header, 3-Pin"
P3: "Header, 4-Pin"
P5: "Header, 10-Pin"
Q1 Q2 Q3 Q16: "NMOSFET"
Q8: library part BUK92150-55A, "BUK92150-55A"
Q9: library part NPN, "NPN Bipolar Transistor"
Q10 Q13 Q14 Q15 Q18: library part Si4004DY, "Si4004DY"
Q17 Q19: library part NPN
R1 R2 R3 R4 R5 R6 R7 R8 R9 R10 R11 R22 R52 R53 R58 R59: library part 1K, "CR85-102J"
R12 R13 R14 R15 R17 R19 R27 R29 R35 R38 R41 R43 R44 R45 R46 R48 R49 R55 R56: library part Res3, "Resistor"
R16 R18 R20 R21 R24 R25 R26 R28 R34 R36 R37 R39 R40 R42 R47 R50 R51 R54 R57 R60 R61 R62 R64 R65 R66 R67 R68 R71 R72 R73: library part "Res Semi", "Semiconductor Resistor"
R23 R63 R69 R70: library part R, "R"
U4: "STM32 ARM-based 32-bit MCU with 64 Kbytes Flash, 64-pin LQFP, Industrial Temperature"
U5: library part TLV70230DBVR
USB1: "Header, 5-Pin"
Y1: library part XTAL, "Crystal Oscillator"

## Via types
v1: diameter 30, hole 20, Top Layer to Bottom Layer, tented both sides, 158 vias
v2: diameter 20, hole 12, Top Layer to Bottom Layer, tented both sides, 143 vias
v3: diameter 40, hole 25, Top Layer to Bottom Layer, tented both sides, 54 vias

## Nets (pads, with @x,y where several pads share a name; then routed paths per layer and width w, separated by ;. In a path a pad name is that pad's centre, name@x,y a point inside that pad or via, vN(x,y) a via of type N, cw(c..) or ccw(c..) an arc to the next point about the centre after c; other vN are vias at no path point)
+5V: FB1.1 J2.4 J5.4 P7.1 P7.2 USB1.1 | length 5544.7
  Top Layer w30: J2.4@611.77,-207 615.77,-203 725,-203 752.99,-230.99 752.99,-796 752.99,-802 749.77,-805.22 749.77,-976 749.77,-1729.77 824,-1804 824,-2088 780,-2132 643.81,-2132 P7.1@637.8,-2125.98
  Top Layer w60: J2.4@611.77,-207 611.77,-133 663.77,-81 1175.77,-81 1208.77,-114 J5.4@1208.77,-207 ; v3(3098,-722) 3099,-721 FB1.1@3099,-658
  Bottom Layer w60: v1(749,-852.89) 975.11,-852.89 1137,-691 3022,-691 3055,-724 3096,-724 v3(3098,-722)
+12V: C29.1 C30.1 C31.1 D1.K D4.K D5.K D6.K J1.2 J6.2 J7.2 J9.2 L1.2 R48.1 R49.1 | length 5363.1
  Top Layer w10: 2423.77,-3100 2434.77,-3111 2491.77,-3111 2509.77,-3093 2738.77,-3093 2756.77,-3111 v2(2900.77,-3111)
  Top Layer w50: 1404.77,-3871 J7.2@1404.77,-3733.5 ; 1906.27,-3871 J6.2@1906.27,-3733.5 ; D6.K@2601.77,-3774 2601.77,-3862 2610.77,-3871 ; 2811.77,-3871 2874.89,-3871 2894.77,-3851.12 J9.2@2894.77,-3733
  Top Layer w100: v3(985.77,-3871) 1088.77,-3871 ; D5.K@1096.77,-3767 1096.77,-3863 1088.77,-3871 ; v3@1439.77,-3869 v3@1437.77,-3871 ; D4.K@1610.26,-3766 1610.26,-3863.51 1602.77,-3871 ; 1946.77,-3867 1942.77,-3871 ; 2111.74,-3868.03 D1.K@2111.74,-3766 ; 2441.77,-3677 v3(2441.77,-3799) v3@2369.77,-3871 ; 2811.77,-3871 2610.77,-3871 v3@2369.77,-3871 ; 1088.77,-3871 v3(1109.77,-3871) v3(1230.77,-3871) v3(1330.77,-3871) 1404.77,-3871 v3@1437.77,-3871 ; v3@1437.77,-3871 v3(1441.77,-3871) v3(1548.77,-3871) 1602.77,-3871 ; 1602.77,-3871 v3(1642.77,-3871) v3(1744.77,-3871) v3(1855.77,-3871) 1906.27,-3871 1942.77,-3871 ; 1942.77,-3871 v3(1967.77,-3871) v3(2067.77,-3871) v3(2164.77,-3871) v3(2259.77,-3871) v3@2369.77,-3871
  Bottom Layer w10: v2(2900.77,-3111) R49.1@2900.77,-3068 2900.77,-3011.5 R48.1@2901.27,-3011
  Bottom Layer w50: 1404.77,-3871 J7.2@1404.77,-3733.5 ; 1906.27,-3871 J6.2@1906.27,-3733.5 ; 2407.77,-3871 J1.2@2407.77,-3733.5
  Bottom Layer w100: v3(985.77,-3871) v3(1109.77,-3871) v3(1230.77,-3871) v3(1330.77,-3871) 1404.77,-3871 v3(1441.77,-3871) v3(1548.77,-3871) v3(1642.77,-3871) v3(1744.77,-3871) v3(1855.77,-3871) 1906.27,-3871 v3(1967.77,-3871) v3(2067.77,-3871) v3(2164.77,-3871) v3(2259.77,-3871) 2370.77,-3871 v3(2376.46,-3865.31)
  other v3: 2347.77,-2977 2410.77,-2971 2346.77,-2908 2406.77,-2908 2348.77,-2841 2409.77,-2832 2348.77,-2771 2408.77,-2769
+48V: J11.2 Q18.1 Q18.2 Q18.3
A1: P5.2 R9.1 U4.15 | length 3160.3
  Top Layer w8: v2(789.77,-1465) v2(789.77,-336) ; R9.1@1503.77,-364 1576.77,-364 1601.77,-339 P5.2@1601.77,-207 ; v2(1586,-1380) 1586.41,-1379.59 U4.15@1635,-1379.59
  Bottom Layer w8: v2(789.77,-1465) 1238,-1465 1298,-1405 1561,-1405 v2(1586,-1380) ; v2@789.77,-337 1547.77,-337 1601.77,-283 P5.2@1601.77,-207
A2: P5.4 R8.1 U4.16 | length 3376.8
  Top Layer w8: v2@821.77,-1497 v2(821.77,-1496) v2(821.77,-365) ; U4.16@1635,-1399.28 1635,-1431 v2(1636,-1432) ; R8.1@1704.02,-364 1776.77,-364 1801.77,-339 P5.4@1801.77,-207
  Bottom Layer w8: v2@821.77,-1497 874,-1497 889,-1482 1250,-1482 1312,-1420 1565,-1420 1577,-1432 v2(1636,-1432) ; v2(821.77,-365) 1771.77,-365 1801.77,-335 P5.4@1801.77,-207
A3: P5.6 R7.1 U4.17 | length 3576.4
  Top Layer w8: v2(846.77,-1528) v2@846.77,-395 ; v2(1700,-1498) 1700.3,-1497.7 U4.17@1733.43,-1497.7 ; R7.1@1904.27,-364 1960.77,-364 2001.77,-323 P5.6@2001.77,-207
  Bottom Layer w8: v2(845.77,-394) 1951.77,-394 2001.77,-344 P5.6@2001.77,-207 ; v2(846.77,-1528) 1670,-1528 v2(1700,-1498)
A4: P5.8 R59.2 U4.20 | length 4063.4
  Top Layer w8: U4.20@1792.48,-1497.7 v2(1792.48,-1435.82) v2@1793,-1435.3 ; R59.2@2104.52,-364 2176.77,-364 2201.77,-339 P5.8@2201.77,-207 ; v2(3016.77,-1551) 3016.77,-1427 2997,-1407.23 2997,-369.77 3081.77,-285 v2(3081.77,-148)
  Bottom Layer w8: v2(1792.48,-1435.82) 2285.82,-1435.82 2402,-1552 v2@3016.77,-1552 ; P5.8@2201.77,-207 2201.77,-100 2244.77,-57 2990.77,-57 v2(3081.77,-148)
A5: P5.10 R58.1 U4.21 | length 3710.2
  Top Layer w8: v2(1793,-1399) 1812.17,-1418.17 U4.21@1812.17,-1497.7 ; R58.1@2304.77,-364 2355.77,-364 2401.77,-318 P5.10@2401.77,-207 ; v2@2991.77,-1516 v2(2991.77,-1515) 2991.77,-1430 2980,-1418.23 2980,-340.77 3040.77,-280 v2(3040.77,-165)
  Bottom Layer w8: v2(1793,-1399) 1816,-1422 2322,-1422 2416,-1516 2990.77,-1516 v2(2991.77,-1515) ; P5.10@2401.77,-207 2401.77,-150 2456.77,-95 2970.77,-95 v2(3040.77,-165)
A6: J2.1 R22.1 U4.26 | length 3307.6
  Top Layer w8: v2(264.77,-1215) v2(386.77,-1215) ; R22.1@310.77,-387 310.77,-208 J2.1@311.77,-207 ; v2(923.77,-1583) v2(923.77,-1215) ; U4.26@1910.59,-1497.7 v2(1910.59,-1582.59) v2@1911,-1583
  Bottom Layer w8: v2(264.77,-1215) 264.77,-566 311.77,-519 J2.1@311.77,-207 ; v2(386.77,-1215) v2(923.77,-1215) ; v2(923.77,-1583) v2@1911,-1583
BLK: P1.7 U4.36 | length 1583.4
  Top Layer w8: U4.36@2127.13,-1340.22 v2(2205.78,-1340.22) ; v2(2334.22,-1340.22) v2(2334.22,-960.78)
  Bottom Layer w8: v2(2205.78,-1340.22) v2(2334.22,-1340.22) ; v2(2334.22,-960.78) 2686.22,-960.78 2713,-934 P1.7@3320,-934
CTR_OUT1: R1.1 U4.9 | length 1102.6
  Top Layer w8: R1.1@1414,-2083 1410,-2079 1410,-1762 1485,-1687 v2(1485,-1356) ; U4.9@1635,-1261.48 v2(1711.52,-1261.48) v2@1712,-1261
  Bottom Layer w8: v2(1485,-1356) 1496,-1356 1590.52,-1261.48 v2(1711.52,-1261.48)
CTR_OUT2: R5.1 U4.33 | length 994.5
  Top Layer w8: v2(2127.13,-1842) U4.33@2127.13,-1399.28 ; v2@2421,-1842 v2(2420.77,-1842.23) R5.1@2420.77,-2097 R5.1@2422.77,-2095
  Bottom Layer w8: v2(2127.13,-1842) v2@2421,-1842
CTR_OUT3: R10.1 U4.34 | length 774.6
  Top Layer w8: U4.34@2127.13,-1379.59 2171.59,-1379.59 2193,-1401 2193,-2087.77 R10.1@2183.77,-2097
CTR_OUT4: R52.1 U4.8 | length 1031.1
  Top Layer w8: R52.1@1247.77,-2074 1247.77,-1879.23 1462,-1665 1462,-1349 1512,-1299 1545,-1299 1602.2,-1241.8 U4.8@1635,-1241.8
DC: P1.6 U4.35 | length 1855.1
  Top Layer w8: U4.35@2127.13,-1359.91 2185.91,-1359.91 2223,-1397 v2(2223,-1464) ; v2(3213,-1570) v2(3213,-1034)
  Bottom Layer w8: v2(2223,-1464) 2289,-1464 2395,-1570 v2(3213,-1570) ; v2(3213,-1034) P1.6@3320,-1034
GND: C1.1 C2.1 C3.1 C4.1 C5.1 C6.1 C7.1 C9.2 C10.2 C11.2 C12.1 C13.2 C15.2 C18.2 C19.2 C20.2 C22.1 C25.2 C26.1 C27.1 C28.2 C29.2 C30.2 C31.2 C34.2 C35.1 C36.2 C39.1 C40.1 C41.2 C50.2 J2.2 J3.1 J4.1 J5.2 J11.1 J13.1 L4.2 P1.1 P3.3 P4.2 P5.1 P5.3 P5.5 P5.7 P5.9 P7.3 P7.4 P7.5 P7.6 P7.7 P7.8 Q1.3 Q2.3 Q3.3 Q14.1 Q14.2 Q14.3 Q15.1 Q15.2 Q15.3 Q16.3 Q17.2 Q18.4 R3.1 R6.1 R11.1 R26.1 R34.1 R43.2 R45.2 R47.1 R50.1 R51.1 R53.1 R54.1 R55.1 R62.1 R72.2 U1.1 U1.14 U1.15 U2.4 U2.5 U2.7 U3.6 U3.9 U3.12 U3.15 U3.16 U3.21 U4.12 U4.18 U4.31 U4.47 U4.60 U4.63 U5.2 U5.4 U6.6 U6.9 U6.12 U6.15 U6.16 U6.21 USB1.4 USB1.5 | length 1803.1
  Top Layer w8: U4.12@1635,-1320.54 1701.46,-1320.54 v2(1715,-1307) ; v2(1735,-1424) 1753.11,-1442.11 U4.18@1753.11,-1497.7 ; U4.63@1753.11,-1005.57 1757.89,-1000.8 1757.89,-973.81 v2(1789.7,-942) 1795,-942 1812.17,-959.17 U4.60@1812.17,-1005.57 ; U4.31@2009.02,-1497.7 2009.02,-1560.02 v2(2015,-1566) ; v2@2064.72,-1123 2065.41,-1123.68 U4.47@2127.13,-1123.68 ; v2(3421,-540) 3401,-520 3401,-486 3419.6,-467.4 U5.2@3432.77,-467.4 U5.2@3430.23,-469.94
  Bottom Layer w8: R43.2@1734.72,-2942.94 1739.21,-2942.94 1814.93,-2867.23 U6.6@1814.93,-2853.9 U6.21@1814.93,-2794.84 ; U6.9@1755.87,-2853.9 1755.87,-2836.9 U6.21@1807.77,-2785 ; U6.12@1755.87,-2716.1 1755.87,-2737.1 1796.77,-2778 U6.21@1823.77,-2778 ; U6.21@1814.93,-2769.16 U6.15@1814.93,-2716.1 ; U6.21@1834.61,-2775.16 U6.16@1834.61,-2716.1 ; U1.1@2759.49,-1085 2910,-1085 C35.1@2914,-1089 ; U3.9@2825.87,-2757.9 2825.87,-2736.1 2825.77,-2736 U3.21@2872.77,-2689 ; U3.12@2825.87,-2620.1 2825.87,-2640.1 2874.77,-2689 U3.21@2894.77,-2689 ; C34.2@2837.83,-3070 2842.9,-3064.93 R45.2@2842.9,-3011 ; U3.6@2884.93,-2757.9 2884.93,-2698.84 U3.21@2894.77,-2689 ; U3.15@2884.93,-2620.1 2884.93,-2679.16 U3.21@2894.77,-2689 ; U3.16@2904.61,-2620.1 2904.61,-2679.16 U3.21@2894.77,-2689 ; C18.2@3018.02,-3011 R50.1@3076.4,-3011 R51.1@3134.77,-3011
  other v1: 2960,-3905 3029,-3852 3033,-3741 2853,-3556 2937,-3556 3024,-3553 2856,-3483 2598,-3482 2507,-3481 2689,-3481 2773,-3481 2940,-3480 3035,-3478 1221,-3469 1975,-3468 2432,-3459 2351,-3424 3627,-3416 3539,-3415 3529,-3352 3622,-3351 848,-3147 929,-3109 910,-3041 847,-3021 3258,-2756 1319,-2739 1244,-2737 1423,-2735 3118,-2694 3267,-2692 1392,-2673 1236,-2666 1329,-2666 3198,-2660 3118,-2637 3266,-2624 3199,-2598 3116,-2577 3276,-2546 3199,-2527 3147,-2399 3263,-2389 1380,-2387 1039,-2385 2053,-2384 1253,-2377 2147,-2376 3011,-2334 2618,-2331 2825,-2322 2740,-2306 3312,-2267 2210,-2265 1080,-2258 1362,-2252 1244,-2248 2493,-2244 1978,-2236 2910,-2236 1667,-2234 1813,-2234 3145,-2231 2755,-2216 2646,-2199 2962,-2195 1330,-2159 1842,-2142 3294,-2133 965,-2127 1685,-2115 3196,-2108 2701,-2100 2843,-2100 3031,-2100 1328,-2064 1043,-1964 1155,-1962 918,-1946 1167,-1876 912,-1868 1029,-1861 587,-1764 1639,-1753 1511,-1751 1304,-1724 589,-1683 802,-1561 1562,-1484 606,-1410 3056.03,-1361.01 1832,-1281 1935,-1275 1265,-1261 3044,-1220 1850,-1215 185,-1170 1847,-1131 62,-1117 3071,-1117 1263,-1112 2022,-1103 214,-1023 642,-1001 1076,-990 97,-986 981,-961 647,-937 1107,-888 2635,-884 143,-876 61,-863 2070,-822 2196,-822 2376,-822 2504,-815 1647,-789 1251,-788 1495,-788 100,-741 494,-741 954,-732 448,-677 1015,-653 639,-640 350,-638 2569,-585 2467,-584 2865,-574 992,-528 1491,-524 1638,-522 2358,-520 2177,-519 1818,-516 2023,-515 2536,-493 2560,-389
  other v2: 3388,-3227 3352.09,-3204.99 2735,-3173 2731,-3139 2064.72,-1124 3296,-557
HUMID_EN: R71.1 U4.53 | length 1617.7
  Top Layer w8: U4.53@1949.96,-1005.57 v2(1949.96,-924) ; v2(2406,-914) 2406,-1134 2391,-1149 2391,-1627 2482,-1718 2482,-1719 2482,-1847 2516,-1881 R71.1@2567,-1881
  Bottom Layer w8: v2(1949.96,-924) 2292,-924 2302,-914 v2(2406,-914)
IIC_SCL: J3.2 R12.2 U4.58 | length 1710.8
  Top Layer w8: U4.58@1851.54,-1005.57 1851.54,-909.46 1873,-888 v2(1873,-764) ; v2(2676.77,-761.77) v2(2676.77,-314)
  Bottom Layer w8: v2(1873,-764) 1881.26,-755.74 R12.2@1984,-755.74 ; R12.2@1984,-761.77 v2(2676.77,-761.77) ; v2(2676.77,-314) 2764.77,-314 2789.77,-289 J3.2@2789.77,-207
IIC_SDA: J3.3 R13.2 U4.59 | length 1886.2
  Top Layer w8: U4.59@1831.85,-1005.57 1831.85,-891.15 1850,-873 v2(1850,-785) v2@1853,-788 ; v2(2699.77,-785.77) v2(2699.77,-338)
  Bottom Layer w8: R13.2@1797,-759.74 1824.74,-759.74 v2(1850,-785) ; v2@1850.77,-785.77 v2(2699.77,-785.77) ; v2(2699.77,-338) 2843,-338 2889.77,-291.23 J3.3@2889.77,-207
IR: R17.1 U4.24 | length 1292.3
  Top Layer w8: v2(982.77,-1557) 982.77,-1384 ; 982.77,-1466 982.77,-1384 ; R17.1@982.77,-1288 982.77,-1384 ; v2(1871.22,-1546) U4.24@1871.22,-1497.7
  Bottom Layer w8: v2(982.77,-1557) 1860.22,-1557 v2(1871.22,-1546)
KEY1: R64.2 U1.5 U4.27 | length 1290.2
  Top Layer w8: U4.27@1930.28,-1497.7 v2(1930.28,-1402)
  Bottom Layer w8: v2(1930.28,-1402) 2331,-1402 2422,-1493 2611,-1493 2644,-1460 2644,-1323 2682,-1285 U1.5@2759.49,-1285 2836,-1285 2862,-1259 R64.2@2909.94,-1259
KEY2: R18.2 U1.6 U4.4 | length 1351.6
  Top Layer w8: U4.4@1635,-1163.06 v2(1697.35,-1163.06) v2@1697.4,-1163 ; v2(2427,-1335) v2(2669,-1335)
  Bottom Layer w8: v2(1697.35,-1163.06) 2032,-1163.06 2162.24,-1293.29 2385.29,-1293.29 v2(2427,-1335) ; v2(2669,-1335) U1.6@2759.49,-1335 2832,-1335 2845,-1322 R18.2@2909.94,-1322
KEY3: R16.2 U1.7 U4.22 | length 1668.2
  Top Layer w8: U4.22@1831.85,-1497.7 1831.85,-1704.85 v2(1887,-1760) ; v2(2663,-1760) v2(2663,-1483)
  Bottom Layer w8: v2(1887,-1760) v2(2663,-1760) ; v2(2663,-1483) 2663,-1410.35 2688.35,-1385 U1.7@2759.49,-1385 R16.2@2909.94,-1385
KEY4: R28.2 U1.8 U4.23 | length 1551.6
  Top Layer w8: U4.23@1851.54,-1497.7 1851.54,-1689.54 v2(1886,-1724) ; v2@2696,-1724 v2(2696,-1491)
  Bottom Layer w8: v2(1886,-1724) v2@2696,-1724 ; v2(2696,-1491) 2696,-1453.65 2695,-1452.65 2712.65,-1435 U1.8@2759.49,-1435 2840,-1435 2855,-1450 2907.94,-1450 R28.2@2909.94,-1448
  other v2: 2696,-1723
LED_CTRL1: U4.3
LED_CTRL2: U4.61
LED_STATUS: U4.2
MISO: P1.8 U4.56 | length 1617.9
  Top Layer w8: v2@1873.31,-922 1890.22,-938.91 1890.22,-1004.89 U4.56@1890.91,-1005.57
  Bottom Layer w8: v2@1870,-922 v2(1872,-922) 1891,-922 1940,-971 2272,-971 2305,-938 2636,-938 2669,-905 3187,-905 3258,-834 P1.8@3320,-834
MOSI: P1.4 U4.55 | length 1748.8
  Top Layer w8: U4.55@1910.59,-1005.57 1910.59,-1058.59 v2(1911,-1059) ; v2(3183,-1234) v2(3183,-1005)
  Bottom Layer w8: v2(1911,-1059) 1910,-1059 1910,-1035 1933,-1012 2676,-1012 2697,-1033 3097,-1033 3125,-1005 v2(3183,-1005) ; v2@3182,-1233 v2(3183,-1234) P1.4@3320,-1234
NetC1_2: C1.2 R14.2 U4.5 Y1.2 | length 425.2
  Top Layer w8: C1.2@1372.74,-987 1372.74,-1120.06 Y1.2@1373,-1120.32 1427.32,-1120.32 1470,-1163 R14.2@1530.74,-1163 ; R14.2@1528,-1160.26 R14.2@1530.74,-1163 ; U4.5@1635,-1182.74 1592.74,-1182.74 1573,-1163 R14.2@1530.74,-1163
NetC2_2: C2.2 R14.1 U4.6 Y1.1 | length 417.9
  Top Layer w8: C2.2@1375.74,-1406 1375.74,-1288.42 Y1.1@1373,-1285.68 1421.32,-1285.68 1468,-1239 R14.1@1528,-1239 1557,-1239 1593.57,-1202.43 U4.6@1635,-1202.43
NetC3_2: C3.2 R15.2 U4.7 | length 538.3
  Top Layer w8: R15.2@1374.74,-1581 1375.74,-1580 C3.2@1375.74,-1498 1377.74,-1500 1419,-1500 1438,-1481 1438,-1345 1497,-1286 1539,-1286 1562.59,-1262.41 1602.89,-1222.11 U4.7@1635,-1222.11
NetC12_2: C12.2 R27.2 U3.11 | length 134.9
  Bottom Layer w10: R27.2@2732.77,-2599.06 2732.77,-2657.94 C12.2@2731.77,-2658.94 2732.3,-2659.47 U3.11@2806.19,-2659.47
NetC14_1: C14.1 C32.1 U3.4 | length 148.7
  Bottom Layer w10: U3.4@2924.3,-2757.9 2924.3,-2798.53 2953.77,-2828 C32.1@2959.77,-2828 2958.77,-2829 C14.1@2958.77,-2888
NetC14_2: C14.2 R29.2 | length 57.3
  Bottom Layer w10: R29.2@2842.77,-2887.06 2898.77,-2887.06 C14.2@2899.72,-2888
NetC15_1: C15.1 U6.3 | length 271.1
  Bottom Layer w10: U6.3@1873.98,-2853.9 1873.98,-2872.21 1887.77,-2886 1920.77,-2886 2056.77,-3022 C15.1@2064.77,-3022
NetC16_1: C16.1 HUMID3.2 L2.2 | length 662.7
  Bottom Layer w40: L2.2@75,-2001 75,-1832.77 HUMID3.2@115.77,-1792 ; L2.2@78.84,-2001 78.84,-2026.07 183.77,-2131 331.77,-2131 409.77,-2209 C16.1@409.77,-2214
NetC17_1: C17.1 C46.2 L4.1 Q9.3 | length 2451.8
  Bottom Layer w30: Q9.3@93.77,-2212.23 Q9.3@93.77,-2207
  Bottom Layer w40: C46.2@55.77,-2656 55.77,-2714 136.77,-2795 136.77,-2953 C17.1@76.77,-3013 76.77,-3215 L4.1@141.77,-3280 141.77,-3051 233.77,-2959 303.77,-2959 321.77,-2941 321.77,-2789.13 293.64,-2761 190.77,-2761 144.77,-2715 144.77,-2649 177.77,-2616 288.77,-2616 324.77,-2580 324.77,-2522 291.77,-2489 66,-2489 30,-2453 30,-2276 Q9.3@93.77,-2212.23
NetC18_1: C18.1 U3.3 | length 226.3
  Bottom Layer w10: U3.3@2943.98,-2757.9 2943.98,-2770.21 2975.04,-2801.27 2977.69,-2801.27 3018.02,-2841.6 C18.1@3018.02,-2951.94
NetC21_1: C21.1 R19.1 | length 63.4
  Bottom Layer w10: R19.1@2924.77,-2467 2986.77,-2467 C21.1@2987.77,-2466
NetC21_2: C21.2 L1.1 Q10.1 Q10.2 Q10.3 Q15.5 Q15.6 Q15.7 Q15.8 R27.1 U3.19 | length 721.6
  Top Layer w10: Q15.8@2708.85,-2589.36 2708.85,-2646.08 2723.77,-2661 2898.77,-2661 2932.77,-2627 2932.77,-2538 2942.77,-2528 2974.77,-2528 2997.77,-2551 v2(2997.77,-2619)
  Bottom Layer w10: v2@2687.77,-2539 v2(2688.77,-2540) R27.1@2732.77,-2540 ; C21.2@2987.77,-2525.06 2987.77,-2556 2963.67,-2580.1 U3.19@2963.67,-2620.1 2996.67,-2620.1 v2(2997.77,-2619)
  other v3: 2668.5,-2556.83 2668.5,-2474.41
NetC22_2: C22.2 R21.2 U3.20 | length 241.7
  Bottom Layer w10: U3.20@2983.35,-2659.47 3010.3,-2659.47 3049.77,-2620 C22.2@3049.77,-2523.06 R21.2@3111.77,-2523.06